# Altium PCB VapeixShield.PcbDoc
Units mm, origin at the board's own origin, x right, y up, seen from the top; angles counter-clockwise.
Board outline 70.15 x 53.67 mm, 4 copper layers (Top Layer, Mid-layer1, Mid-Layer2, Bottom Layer), stack 0.778 mm thick; 84 components, 77 nets, 268 pads, 86 vias.
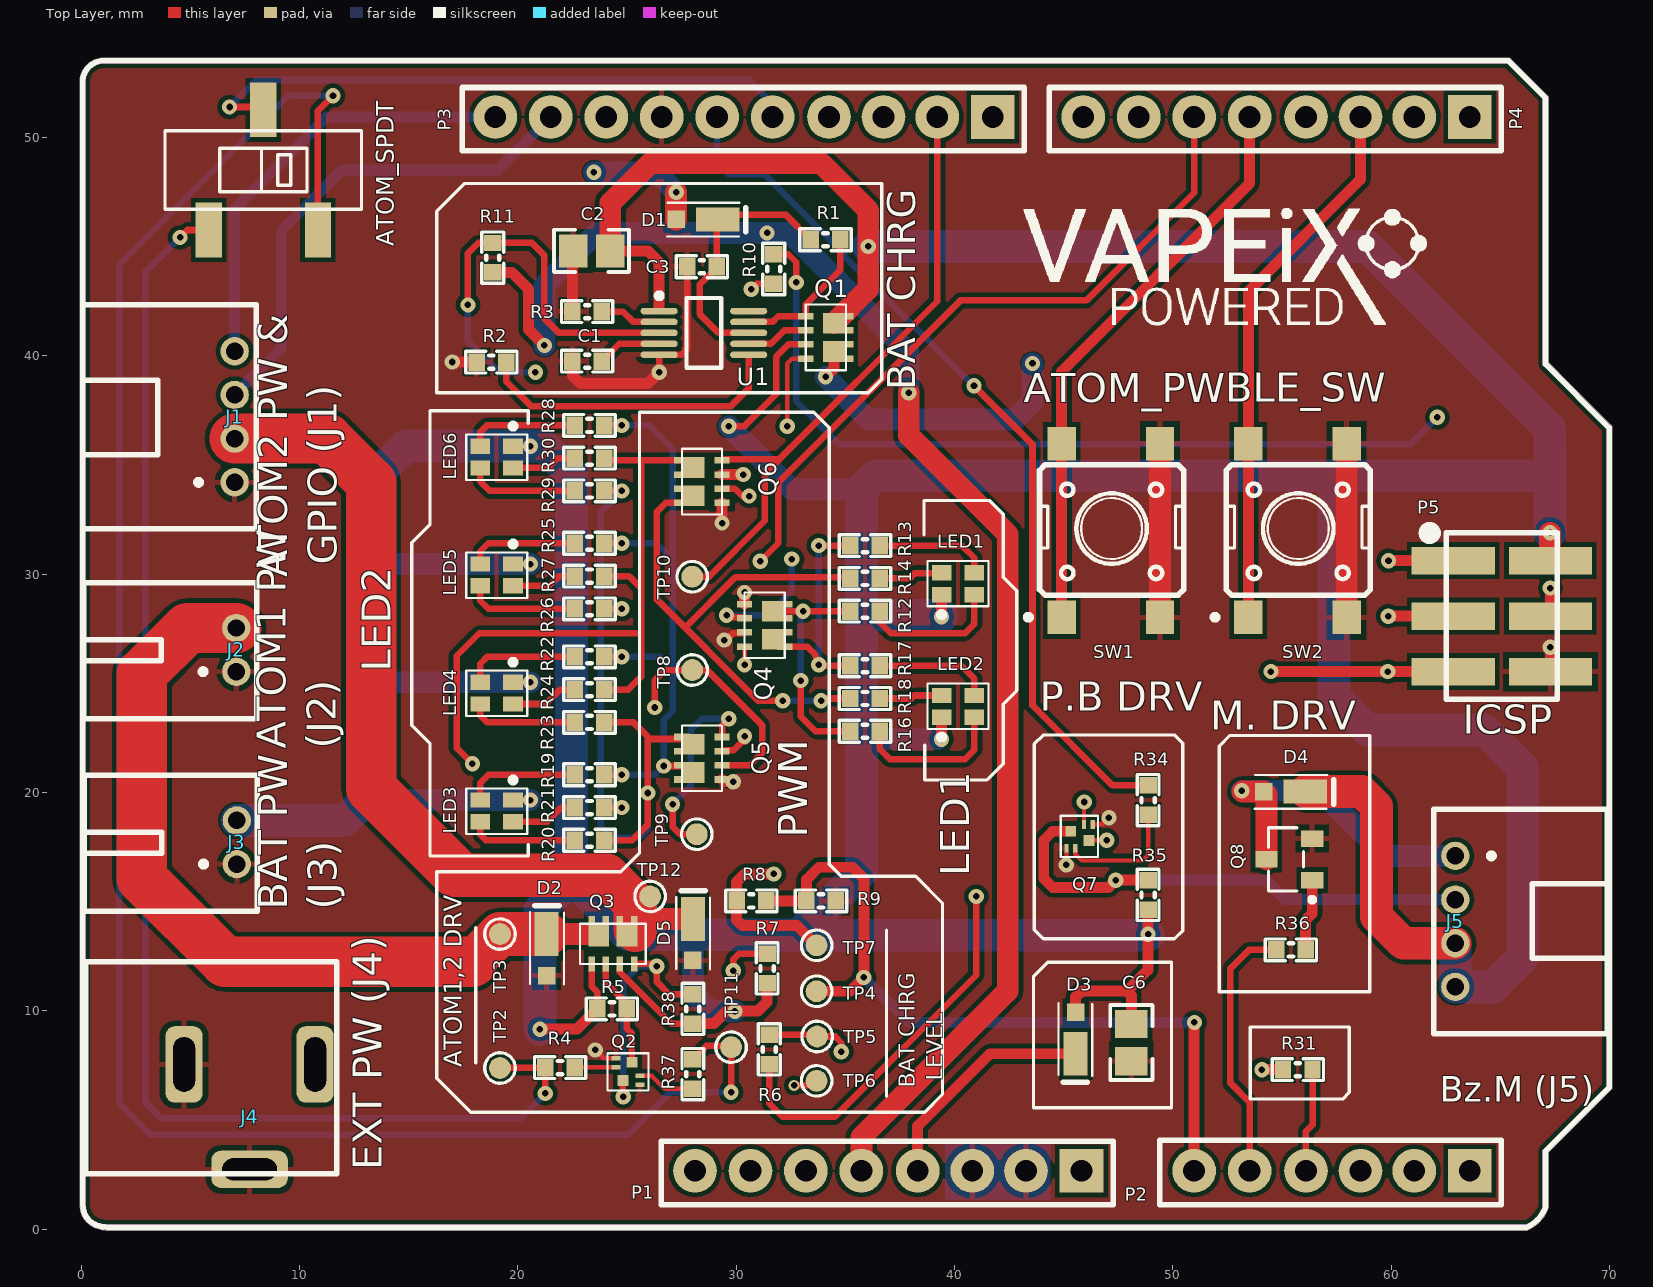
[diagram p0: Top Layer view]
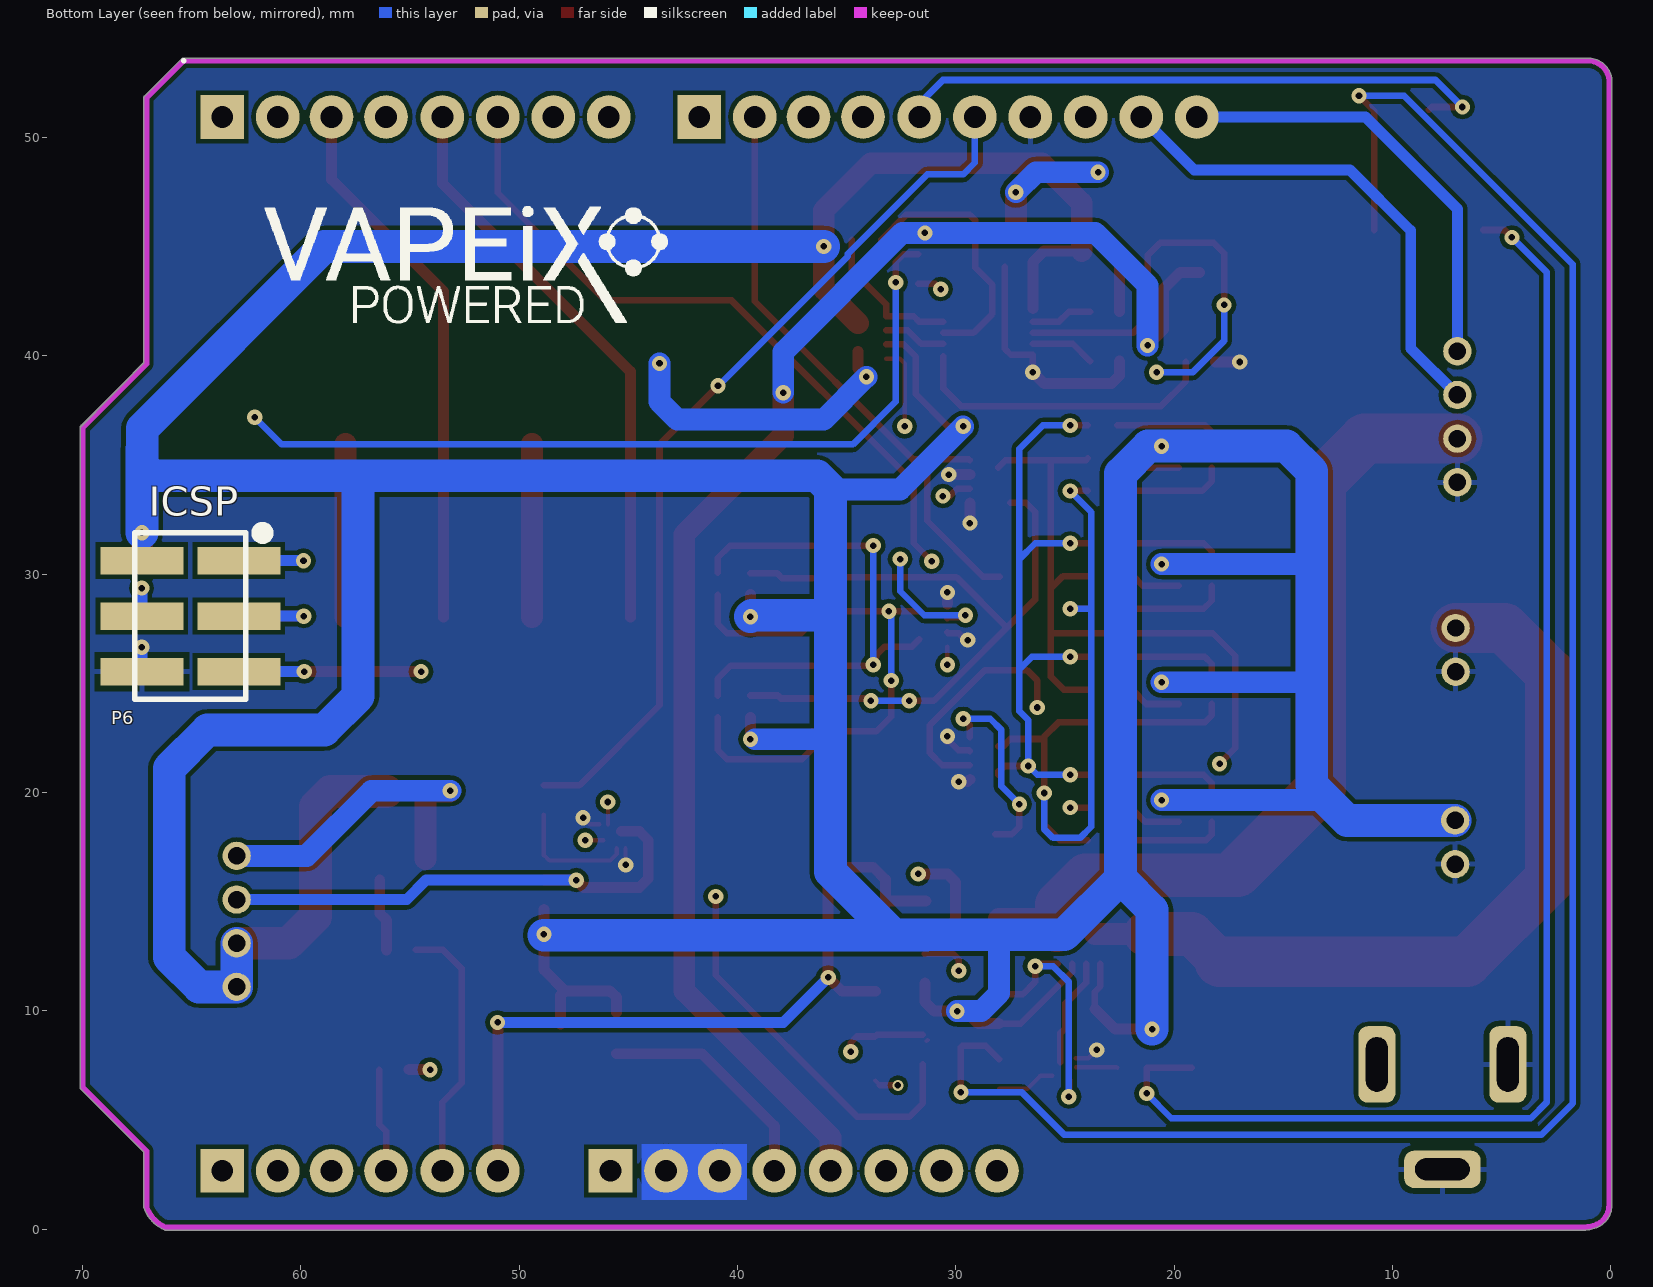
[diagram p1: Bottom Layer view, seen from below]
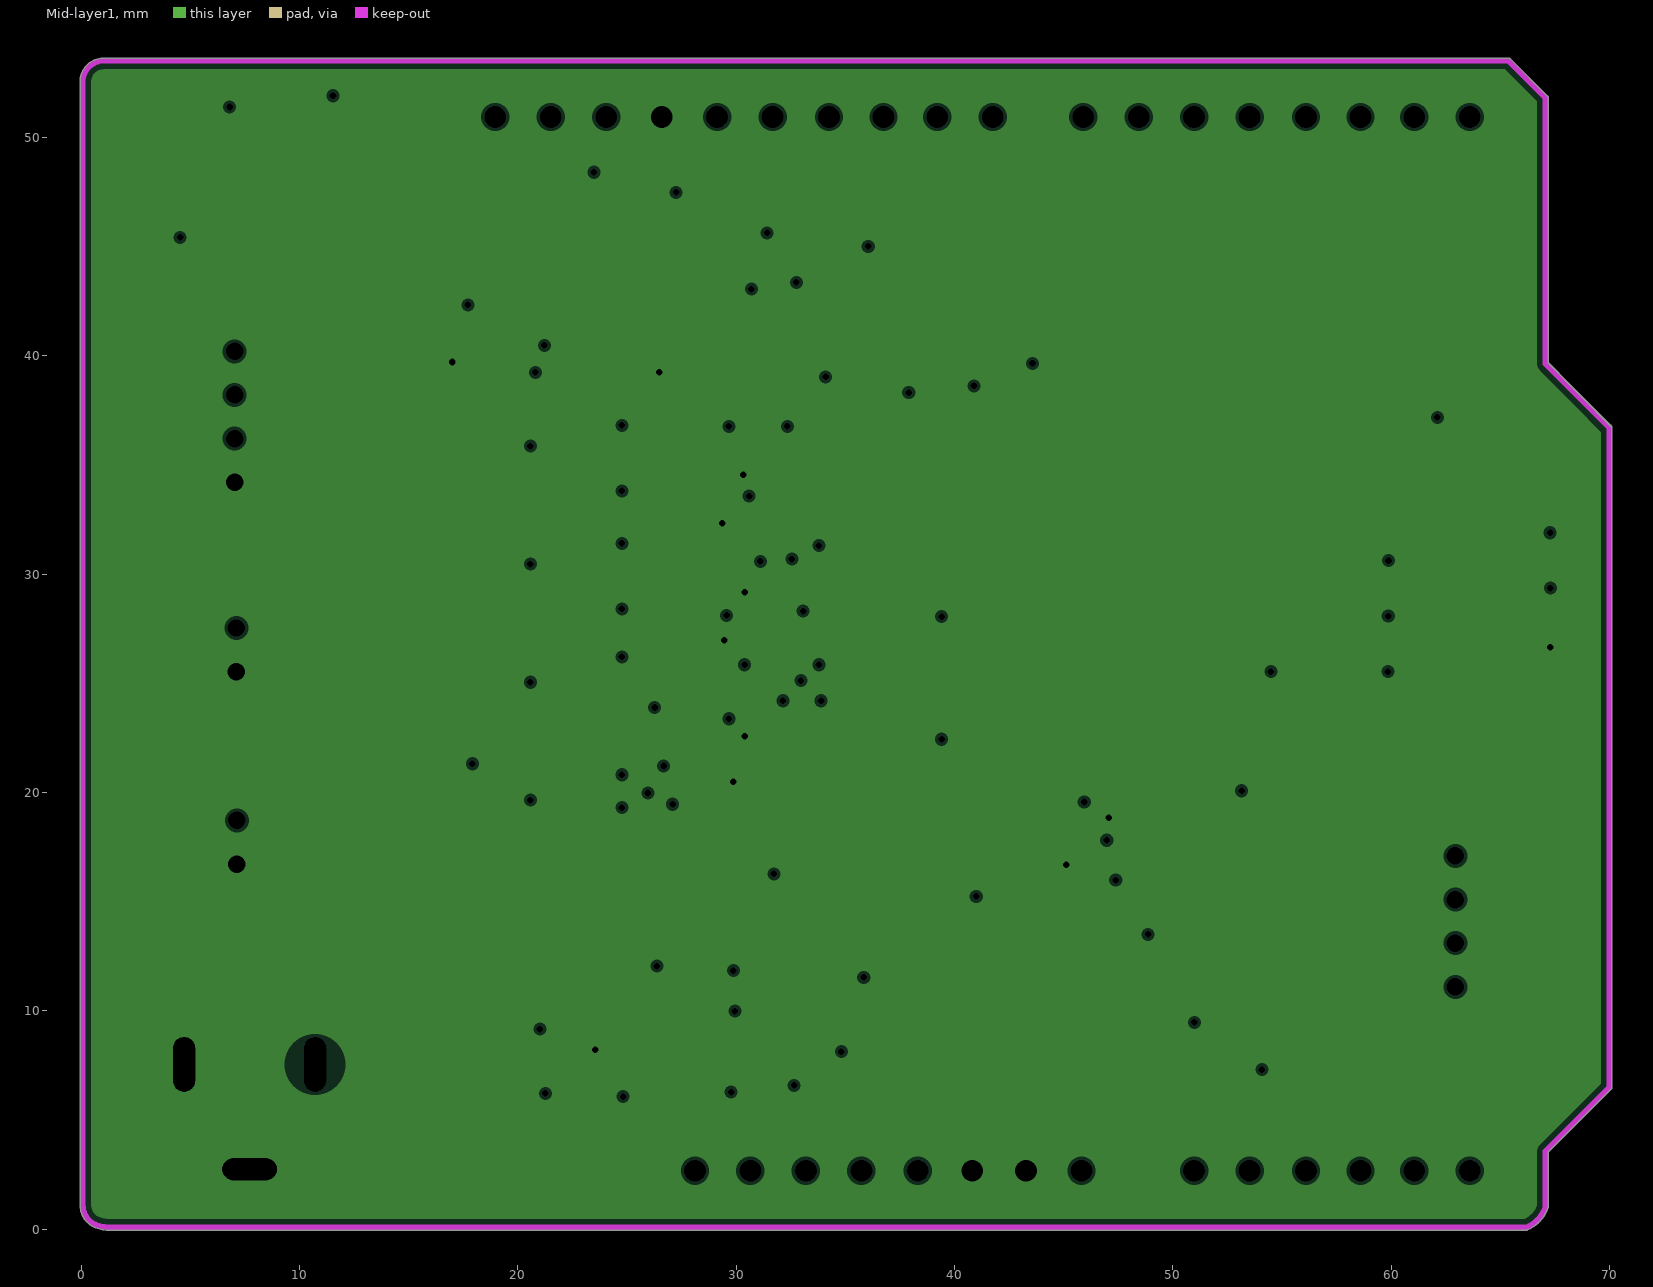
[diagram p2: Mid-layer1, clearances drawn from the general rule]
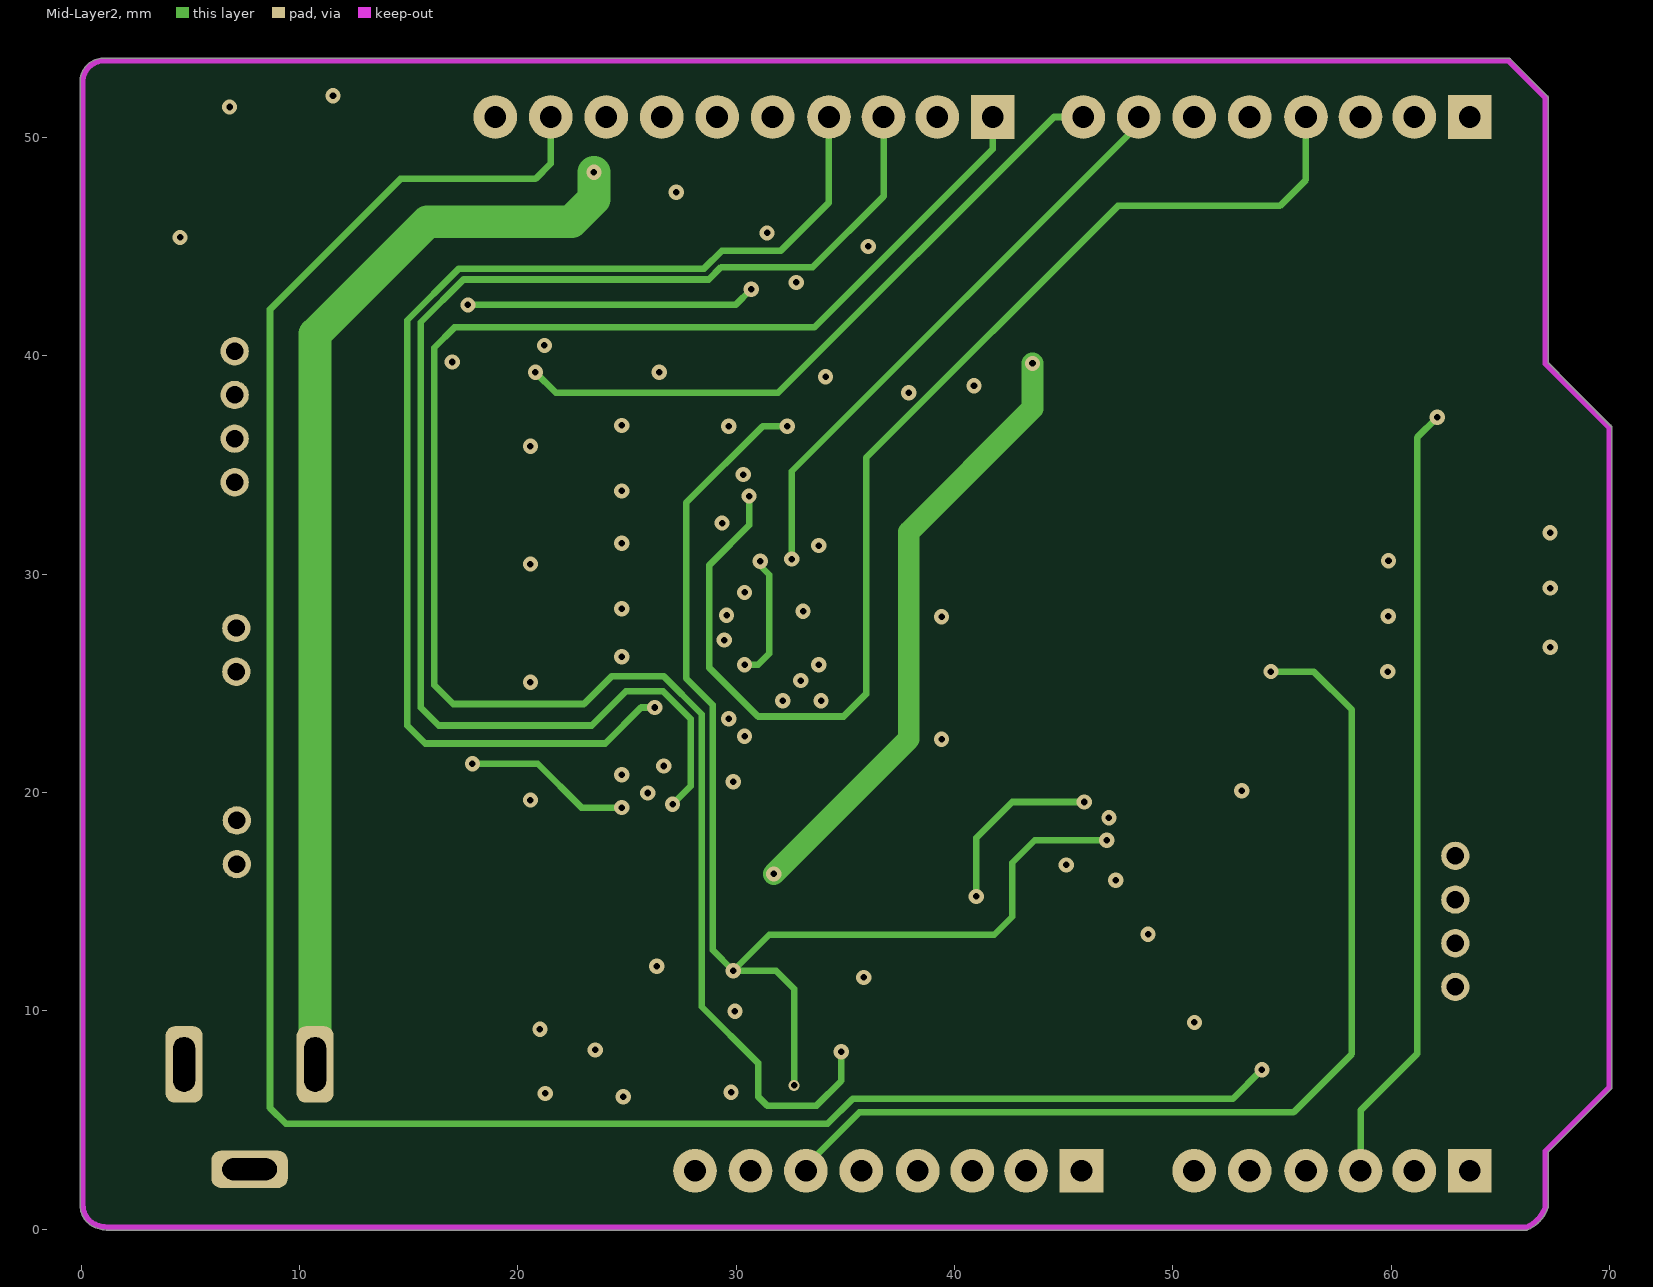
[diagram p3: Mid-Layer2]
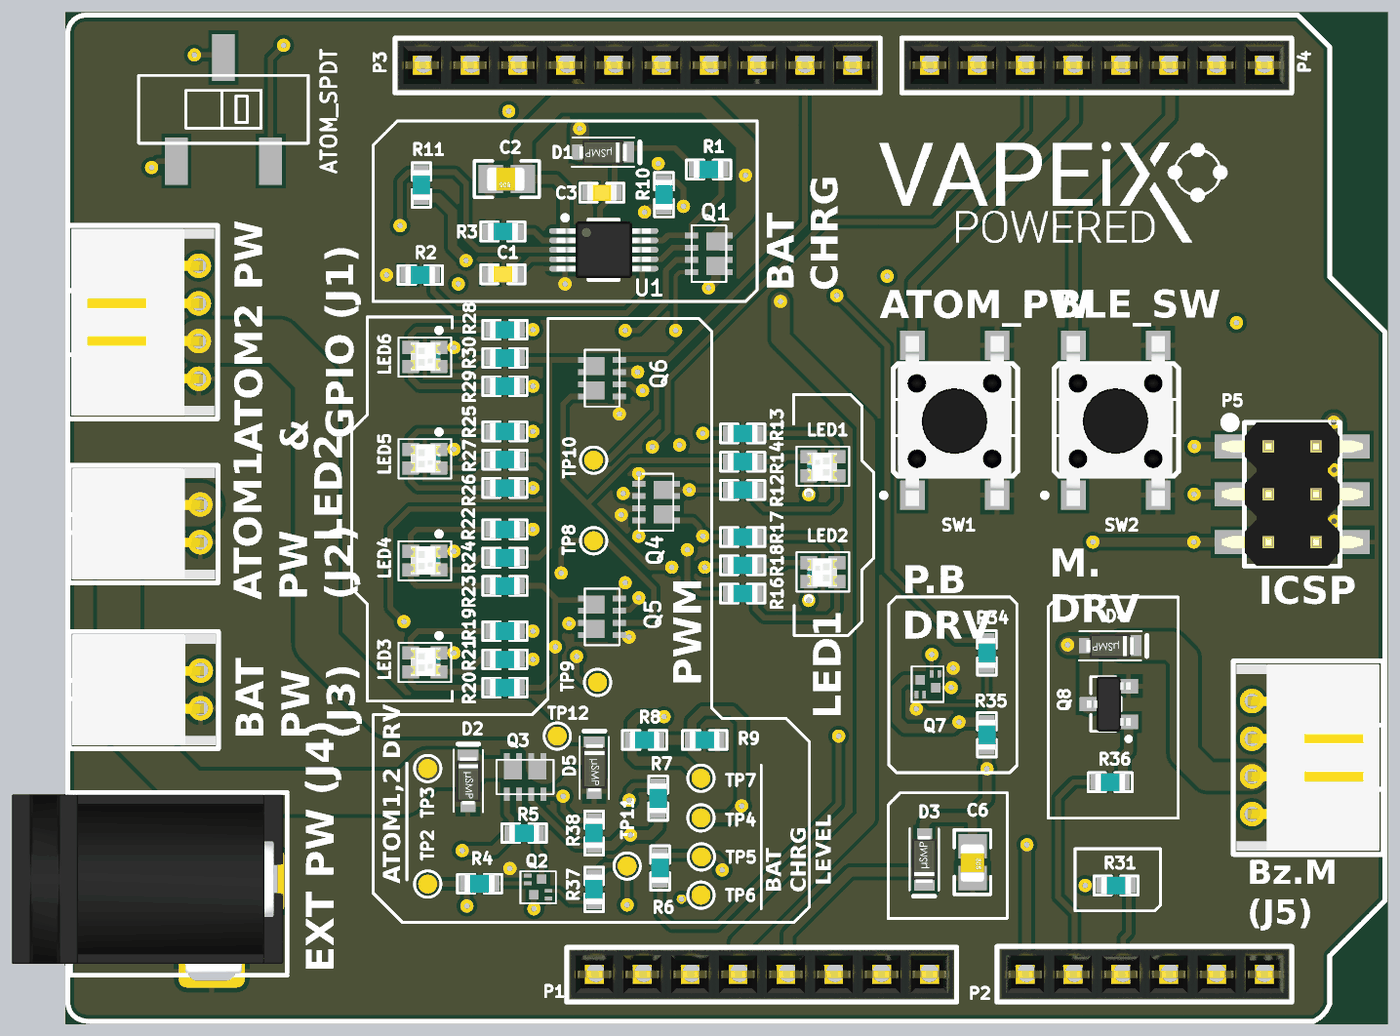
[diagram p4: 3D render of the assembled board from above, using the file's embedded part models]

## Layer stack, top to bottom
Top Solder: solder mask 0.0102, Solder Resist, Dk 3.5
Top Layer: signal copper 0.0356
Dielectric 1: core 0.254, FR-4, Dk 4.2
Mid-layer1: plane copper 0.036, net GND
Dielectric 4: prepreg 0.127, Dk 4.2
Mid-Layer2: signal copper 0.0356
Dielectric 3: core 0.254, FR-4, Dk 4.2
Bottom Layer: signal copper 0.0356
Bottom Solder: solder mask 0.0102, Solder Resist, Dk 3.5

## Board outline
0.145,0.484 cw(c1.045,1.096) -0.044,1.082 cw(c0.081,1.108) -0.045,1.093 cw(c0.081,1.108) -0.046,1.108 -0.046,52.626 cw(c0.081,52.626) -0.046,52.636 cw(c1.039,52.55) 1.092,53.637 65.362,53.637 cw(c65.362,53.51) 65.452,53.6 cw(c65.362,53.51) 65.453,53.599 cw(c65.364,53.508) 65.454,53.598 cw(c65.364,53.508) 65.455,53.598 67.146,51.906 67.146,51.907 cw(c67.056,51.816) 67.183,51.816 67.183,39.677 70.067,36.793 70.067,36.794 cw(c69.977,36.703) 70.104,36.707 ccw(c69.977,36.712) 70.104,36.712 ccw(c69.977,36.712) 70.067,36.802 ccw(c69.977,36.712) 70.034,36.826 70.067,36.802 67.183,39.686 70.104,36.712 70.104,6.504 cw(c69.977,6.504) 70.067,6.414 67.181,3.528 67.181,1.011 cw(c67.054,1.011) 67.174,0.968 cw(c65.569,1.543) 66.242,-0.023 cw(c66.192,0.094) 66.192,-0.033 1.371,-0.033 cw(c1.346,0.091) 1.355,-0.036 cw(c1.273,1.144) 1.05,-0.017 cw(c1.078,0.843) 0.762,0.042 cw(c0.809,0.161) 0.748,0.049 cw(c1.045,1.096)

## Design rules (kind name [scope] priority, off if disabled: settings)
Clearance Clearance_1 [inpoly] p1: gap=0.2
Clearance [All] p2: gap=0.2
ComponentClearance ComponentClearance_1 [InComponent('JP1')] p1: gap=0 collisioncheckmode=3 verticalgap=0 showdistances=FALSE
ComponentClearance [All] p2: gap=0.254 collisioncheckmode=3 verticalgap=0.254 showdistances=FALSE
HoleSize [All] p1: absolutevalues=TRUE maxlimit=8 minlimit=0.2 maxpercent=80.000 minpercent=20.000
HoleToHoleClearance [All] p1: gap=0.1 allowstackedmicrovias=TRUE
MinimumSolderMaskSliver [All] p1: minsoldermaskwidth=0.01
PasteMaskExpansion [All] p1: expansion=0.001
PlaneClearance [All] p1: clearance=0.15
PlaneConnect [All] p1: planeconnectstyle=Direct reliefexpansion=0.254 reliefentries=4 reliefconductorwidth=0.254 reliefairgap=0.254
PolygonConnect PolygonConnect_1 [IsVia] p1: connectstyle=Direct reliefconductorwidth=0.254 reliefentries=4 polygonreliefangle="90 Angle" airgapwidth=0.254
PolygonConnect [All] p2: connectstyle=Relief reliefconductorwidth=0.254 reliefentries=4 polygonreliefangle="90 Angle" airgapwidth=0.254
RoutingVias [All] p1: holewidth=0.3 width=0.5 viastyle="Through Hole" minholewidth=0.3 minwidth=0.5 maxholewidth=0.711 maxwidth=1.27
ShortCircuit [All] p1: allowed=TRUE
SilkToSilkClearance [All] p1: silktosilkclearance=0.01
SilkToSolderMaskClearance [IsPad] p1: minsilkscreentomaskgap=0 clearancetoexposedcopper=TRUE
SolderMaskExpansion SolderMaskExpansion_2 [IsVia] p1: expansion=0 soldermaskfromhole=TRUE
SolderMaskExpansion [All] p2: expansion=0.001
Width [All] p1: maxlimit=3 minlimit=0.2 preferedwidth=0.203
20 further rules are at their usual default settings.

## Components (designator, comment, footprint, x,y, rotation, side; value= is the part's Value field where it differs from the comment)
ATOM_SPDT "SPDT" SPDT 8.343,48.513 r0 top locked
C1 "" CAPC1608X06L 23.175,39.758 r180 top
C2 "Cap Pol3" C0805 23.381,44.805 r180 top
C3 "" CAPC1608X06L 28.428,44.084 r180 top
C6 "Cap Pol3" C0805 48.097,8.555 r270 top
D1 "MSS2P2-M3" MSS2P2-M3 29.149,46.247 r180 top
D2 "MSS2P2-M3" MSS2P2-M3 21.321,13.521 r270 top
D3 "MSS2P2-M3" MSS2P2-M3 45.547,8.04 r90 top
D4 "MSS2P2-M3" MSS2P2-M3 56.06,20.045 r180 top
D5 "MSS2P2-M3" MSS2P2-M3 28.016,14.214 r270 top
J1 "Atom1 (4)" S4B-PH-K-S 7.031,34.21 r90 top locked
J2 "Atom2 (2)" S2B-PH-K-S 7.111,25.537 r90 top locked
J3 "BAT_PW" S2B-PH-K-S 7.134,16.725 r90 top locked
J4 "DC JACK" "DC POWER JACK" 10.717,7.55 r0 top locked
J5 "Driver CON" S4B-PH-K-S 62.934,17.102 r270 top locked
LED1 "HSMF-C114" HSMF-C114 39.406,29.012 r0 top
LED2 "HSMF-C114" HSMF-C114 39.406,23.397 r0 top
LED3 "HSMF-C114" HSMF-C114 19.782,19.709 r180 top
LED4 "HSMF-C114" HSMF-C114 19.782,25.106 r180 top
LED5 "HSMF-C114" HSMF-C114 19.782,30.518 r180 top
LED6 "HSMF-C114" HSMF-C114 19.782,35.918 r180 top
P1 "Header 8" LS-00008 45.812,2.68 r180 top locked
P2 "Header 6H" LS-00007 63.592,2.68 r180 top locked
P3 "Header 10" LS-00009 41.748,50.94 r180 top locked
P4 "Header 8" LS-00008 63.592,50.94 r180 top locked
P5 "TOP" "Molex 15-91-2060" 65.063,28.08 r270 top locked
P6 "BOTTOM" CLH-103-F-D-BE-K-TR 65.063,28.08 r270 bottom locked
Q1 "SI5999EDU" SI5999EDU 33.185,41.818 r270 top
Q2 "BC847CDLP-7" BC847CDLP-7 25.019,7.223 r270 top
Q3 "SI5999EDU" SI5999EDU 23.381,12.154 r0 top
Q4 "SI5936DU" SI5936DU 30.385,28.634 r270 top
Q5 "SI5936DU" SI5936DU 29.355,20.6 r90 top
Q6 "SI5936DU" SI5936DU 29.355,33.269 r90 top
Q7 "BC847CDLP-7" BC847CDLP-7 45.726,18.021 r180 top
Q8 "MMBT2222ALT1G" MMBT2222ALT1G 55.404,16.964 r0 top
R1 "" INDC1608X06L 34.093,45.32 r0 top
R2 "" INDC1608X06L 18.788,39.718 r180 top
R3 "" INDC1608X06L 23.175,42.024 r180 top
R4 "" INDC1608X06L 21.936,7.407 r0 top
R5 "" INDC1608X06L 24.308,10.094 r0 top
R6 "" INDC1608X06L 31.518,8.24 r270 top
R7 "" INDC1608X06L 31.415,11.948 r90 top
R8 "" INDC1608X06L 30.694,15.038 r0 top
R9 "" INDC1608X06L 33.887,15.038 r0 top
R10 "" INDC1608X06L 31.724,43.981 r270 top
R11 "" INDC1608X06L 18.849,44.496 r90 top
R12 "" INDC1608X06L 35.9,28.309 r180 top
R13 "" INDC1608X06L 35.9,31.309 r180 top
R14 "" INDC1608X06L 35.9,29.809 r180 top
R16 "" INDC1608X06L 35.9,22.809 r180 top
R17 "" INDC1608X06L 35.9,25.809 r180 top
R18 "" INDC1608X06L 35.9,24.309 r180 top
R19 "" INDC1608X06L 23.282,20.815 r0 top
R20 "" INDC1608X06L 23.282,17.815 r0 top
R21 "" INDC1608X06L 23.282,19.315 r0 top
R22 "" INDC1608X06L 23.282,26.215 r0 top
R23 "" INDC1608X06L 23.282,23.215 r0 top
R24 "" INDC1608X06L 23.282,24.715 r0 top
R25 "" INDC1608X06L 23.282,31.415 r0 top
R26 "" INDC1608X06L 23.282,28.415 r0 top
R27 "" INDC1608X06L 23.282,29.915 r0 top
R28 "" INDC1608X06L 23.282,36.815 r0 top
R29 "" INDC1608X06L 23.282,33.815 r0 top
R30 "" INDC1608X06L 23.282,35.315 r0 top
R31 "" INDC1608X06L 55.719,7.313 r180 top
R34 "" INDC1608X06L 48.862,19.654 r90 top
R35 "" INDC1608X06L 48.862,15.314 r270 top
R36 "" INDC1608X06L 55.404,12.796 r180 top
R37 "" INDC1608X06L 28.016,7.107 r270 top
R38 "" INDC1608X06L 28.016,10.094 r90 top
SW1 "Atomizer_Power_Button" PTS645SH50SMTR92 44.907,28.028 r90 top
SW2 "Bluetooth Button" PTS645SH50SMTR92 53.453,28.028 r90 top
TP2 "TP" TP 19.182,7.388 r90 top
TP3 "TP" TP 19.182,13.521 r90 top
TP4 "TP" TP 33.684,10.903 r90 top
TP5 "TP" TP 33.707,8.831 r90 top
TP6 "TP" TP 33.684,6.8 r90 top
TP7 "TP" TP 33.684,13.006 r90 top
TP8 "TP" TP 27.988,25.612 r180 top
TP9 "TP" TP 28.197,18.094 r180 top
TP10 "TP" TP 27.988,29.888 r180 top
TP11 "TP" TP 29.767,8.343 r180 top
TP12 "TP" TP 26.059,15.244 r90 top
U1 "LTC4050EMS" LTC4050EMS 26.491,42.068 r270 top locked

## Footprints (in the part's own frame and the unit in brackets; to place one, negate y for a bottom-side part, rotate by r counter-clockwise, add the part's x,y. Pads: shape width x height; smd on the part's side, far side on the other; paste and mask are expansions set on the pad)
BC847CDLP-7 [mm] "TRANS 2NPN 45V 0.1A 6DFN"
  rect 0.2x0.4 smd: 1(-0.609,-0.521) 2(-0.203,-0.521) 4(0.6,0.572) 5(0.196,0.572)
  rect 0.5x0.5 smd: 3(-0.426,0.208) 6(0.404,-0.208)
  silkscreen extent -0.84,-0.91 0.86,0.97, body extent -0.79,-0.67 0.81,0.69, height 0.4
C0805 [mm]
  rect 1.3x1.5 smd: 1(-0.85,0) 2(0.85,0)
  silkscreen extent -1.72,-0.97 1.72,0.97, body extent -0.95,-0.62 1.05,0.63, height 0.78
CAPC1608X06L [mm]
  rect 0.75x0.8 smd: 1(-0.675,0) 2(0.675,0)
  silkscreen extent -1.17,-0.5 1.18,0.5, body extent -0.8,-0.43 0.8,0.43, height 0.8
CLH-103-F-D-BE-K-TR [mm] "SAMTEC - CLH-103-F-D-BE-K-TR - SOCKET, 2.54MM, SMT, 6WAY"
  rect 1.27x3.81 smd: 1(-2.54,2.234) 2(-2.54,-2.211) 3(0,2.234) 4(0,-2.211) 5(2.54,2.234) 6(2.54,-2.211)
  silkscreen extent -4.06,-2.53 3.81,3.57, body extent -3.81,-3.54 3.81,3.57, height 3.56
"DC POWER JACK" [mm] "Adafruit Accessories 2.1mm DC Barrel Jack Breadboard Friendly"
  rrect50% 1.7x3.5 hole 1 slot 2.5 at 90 deg: 1(0,0) 2(-6,0)
  rrect50% 3.5x1.7 hole 1 slot 2.5 at 0 deg: 3(-3,-4.8)
  silkscreen extent -10.5,-5 1,4.7, body extent -13.6,-4.9 0.8,4.6, height 11
HSMF-C114 [mm] "LED RGB DIFFUSED 0606 SMD"
  rect 0.9x0.7 smd: 1(0,0.051) 2(0,1.049) 3(1.5,1.049) 4(1.5,0.051)
  silkscreen extent -0.65,-0.96 2.15,1.6, body extent -0.09,-0.22 1.51,1.28, height 0.34
INDC1608X06L [mm] "PSON, 6-Leads, Body 3x4 mm, Pitch 0.8mm, NSC Recommended"
  rect 0.75x0.8 smd: 1(-0.675,0) 2(0.675,0)
  silkscreen extent -1.18,-0.5 1.17,0.5, body extent -0.8,-0.48 0.8,0.48, height 0.8
LS-00007 [mm] "Arduino Female Stackable Header - 6 pin(4 pack)"
  rect 2x2 hole 1: 1(0,0)
  round 2 hole 1: 2(2.54,0) 3(5,0) 4(7.5,0) 5(10.08,0) 6(12.62,0)
  silkscreen extent -1.45,-1.4 14.2,1.55, body extent -1.27,-1.19 13.97,1.35, height 8.5
LS-00008 [mm] "Arduino Femal e Stackable Headers - 8 pin (4 pack)"
  rect 2x2 hole 1: 1(0,0)
  round 2 hole 1: 2(2.54,0) 3(5,0) 4(7.5,0) 5(10.08,0) 6(12.62,0) 7(15.16,0) 8(17.7,0)
  silkscreen extent -1.45,-1.35 19.25,1.55, body extent -1.27,-1.19 19.05,1.35, height 8.5
LS-00009 [mm] "Arduino Female Stackable Header - 10 pin (4 pack)"
  rect 2x2 hole 1: 1(0,0)
  round 2 hole 1: 2(2.54,0) 3(5,0) 4(7.5,0) 5(10.08,0) 6(12.62,0) 7(15.16,0) 8(17.7,0) 9(20.24,0) 10(22.78,0)
  silkscreen extent -1.45,-1.35 24.3,1.55, body extent -1.27,-1.19 24.13,1.35, height 8.5
LTC4050EMS [mm] "IC BATT CHRG CNTRL LI-ION 10MSOP"
  oval 0.3x1.7 smd: 1(0.016,-0.018) 2(0.516,-0.018) 3(1.016,-0.018) 4(1.516,-0.018) 5(2.016,-0.018) 6(2.016,4.082) 7(1.516,4.082) 8(1.016,4.082) 9(0.516,4.082) 10(0.016,4.082)
  silkscreen extent -0.81,-0.14 2.62,2.83, body extent -0.48,-0.48 2.52,4.55, height 1.05
MMBT2222ALT1G [mil] "TRANS NPN 40V 0.6A SOT23"
  rect 40x30 smd: 1(38.4,-38.18) 2(38.4,36.63) 3(-44.27,-0.78)
  silkscreen extent -40,-78 42,56, body extent -49,-58 43,57, height 39
"Molex 15-91-2060" [mil] "CONN HEADER 6POS .100\" VERT TIN"
  rect 50x150 smd: 1(-100,-87.5) 2(-100,87.5) 3(0,-87.5) 4(0,87.5) 5(100,-87.5) 6(100,87.5)
  silkscreen extent -160,-140 150,100, body extent -150,-148 150,148, height 382
MSS2P2-M3 [mm] "DIODE SCHOTTKY 20V 2A MICROSMP"
  rect 0.8x0.8 smd: 1(1.9,0)
  rect 2x1.1 smd: 2(0,0)
  silkscreen extent -1.3,-0.76 2.31,0.79, body extent -0.59,-0.64 1.91,0.66, height 0.66
PTS645SH50SMTR92 [mm] "SWITCH TACTILE SPST-NO 0.05A 12V"
  rect 1.55x1.3 smd: 1(0,0) 1(7.95,0) 2(0,-4.5) 2(7.95,-4.5)
  silkscreen extent -0.12,-5.59 6.99,1.65, body extent -0.56,-5.24 8.44,0.76, height 4.3
S2B-PH-K-S [mm] "CONN HEADER PH SIDE 2POS 2MM"
  round 1.3 hole 0.8: 1(0,0) 2(2,0)
  silkscreen extent -2.16,-0.94 4.07,6.98, body extent -1.98,-0.78 3.92,6.82, height 4.8
S4B-PH-K-S [mm] "CONN HEADER PH SIDE 4POS 2MM"
  round 1.3 hole 0.8: 1(0,0) 2(2,0) 3(4,0) 4(6,0)
  silkscreen extent -2.13,-1 8.14,6.96, body extent -1.95,-0.83 7.95,6.77, height 4.8
SI5936DU [mm] "MOSFET 2N-CH 30V 6A POWERPAK"
  rect 0.3x0.7 smd: 1(0,0) 2(0.648,0) 3(1.295,0) 4(1.945,0) 5(1.295,1.842) 5(1.945,1.842) 7(0,1.841) 7(0.648,1.841)
  rect 0.945x1 smd: 5(1.619,1.296)
  rect 0.947x1 smd: 7(0.323,1.296)
  silkscreen extent -0.53,0 2.48,1.84, body extent -0.43,0.07 2.35,1.77, height 0.85
SI5999EDU [mm] "MOSFET 2P-CH 20V 6A POWERPAK"
  rect 0.3x0.7 smd: 1(0,0) 2(0.648,0) 3(1.295,0) 4(1.945,0) 5(1.295,1.842) 5(1.945,1.842) 7(0,1.841) 7(0.648,1.841)
  rect 0.945x1 smd: 5(1.619,1.296)
  rect 0.947x1 smd: 7(0.323,1.296)
  silkscreen extent -0.53,0 2.48,1.84, body extent -0.43,0.07 2.35,1.77, height 0.85
SPDT [mm] "JS102011SCQN, Contact rating : 6VDC @ 0.3A"
  rect 1.2x2.5 smd: 1(-2.5,-2.75) 2(0,2.75) 3(2.5,-2.75)
  silkscreen extent -4.5,-1.8 4.5,1.8, body extent -4.52,-3.75 4.52,3.75, height 5.5
TP [mm] "Test Point"
  round 1 smd paste-5: 1(0,0)
  silkscreen extent -0.7,-0.7 0.7,0.7

## Part data
ATOM_SPDT: "SWITCH SLIDE SPDT 300MA 6V"
C1 C3: library part GRM219R61A106KE44D, "CAP, CERM, 10 µF, 10 V, +/- 10%, X5R, 0805"
C2 C6: "Polarized Capacitor (Surface Mount)"
D1 D2 D3 D4 D5: library part MSS2P2-M3/89A, "DIODE SCHOTTKY 20V 2A MICROSMP"
J1 J5: library part S4B-PH-K-S(LF)(SN), "CONN HEADER PH SIDE 4POS 2MM"
J2 J3: library part S2B-PH-K-S(LF)(SN), "CONN HEADER PH SIDE 2POS 2MM"
J4: library part "DC POWER JACK", "Adafruit Accessories 2.1mm DC Barrel Jack Breadboard Friendly"
LED1 LED2 LED3 LED4 LED5 LED6: "LED RGB DIFFUSED 0606 SMD"
P1 P4: library part LS-00008, "Arduino Femal e Stackable Headers - 8 pin (4 pack)"
P2: "Header, 6-Pin, Right Angle"
P3: library part LS-00009, "Arduino Female Stackable Header - 10 pin (4 pack)"
P5: library part 0015912060, "CONN HEADER 6POS .100\" VERT TIN"
P6: library part M20-7870346, "Headers & Wire Housings 03+03 DIL SMT SKT BOTTOM ENTRY TIN"
Q1 Q3: library part SI5999EDU-T1-GE3, "MOSFET 2P-CH 20V 6A POWERPAK"
Q2 Q7: "TRANS 2NPN 45V 0.1A 6DFN"
Q4 Q5 Q6: library part SI5936DU-T1-GE3, "MOSFET 2N-CH 30V 6A PWRPK CHPFET"
Q8: "TRANS NPN 40V 0.6A SOT23"
R1 R2 R3 R4 R5 R6 R7 R8 R9 R10 R11 R12 R13 R14 R16 R17 R18 R19 R20 R21 R22 R23 R24 R25 R26 R27 R28 R29 R30 R31 R34 R35 R36 R37 R38: library part Res2, "Resistor"
SW1 SW2: library part "PTS645SH50SMTR92 LFS", "SWITCH TACTILE SPST-NO 0.05A 12V"
TP2 TP3 TP4 TP5 TP6 TP7 TP8 TP9 TP10 TP11 TP12: "TEST POINT"
U1: library part LTC4050EMS-4.1#PBF, "IC BATT CHRG CNTRL LI-ION 10MSOP"

## Via types
v1: diameter 0.7, hole 0.3, Top Layer to Bottom Layer, 85 vias
v2: diameter 0.5, hole 0.3, Top Layer to Bottom Layer, 1 vias

## Nets (pads, with @x,y where several pads share a name; then routed paths per layer and width w, separated by ;. In a path a pad name is that pad's centre, name@x,y a point inside that pad or via, vN(x,y) a via of type N, cw(c..) or ccw(c..) an arc to the next point about the centre after c; other vN are vias at no path point)
3V3: P1.5 R11.1 | length 69.7
  Top Layer w0.5: R11.1 19.73,43.821 20.497,43.054 20.497,41.2 v1(21.218,40.479)
  Top Layer w1: P1.5 35.732,4.214 42.436,10.918 42.436,31.827 37.904,36.359 v1(37.904,38.316)
  Bottom Layer w1: v1(21.218,40.479) 21.218,43.227 23.62,45.629 v1(31.415,45.629) 32.445,45.629 37.904,40.17 v1(37.904,38.316)
AREF: P3.8
ATM1: D2.2 J2.2 Q3.7 TP3.1 | length 37.6
  Top Layer w0.5: Q3.7@23.633,13.521 Q3.7@23.704,13.45
  Top Layer w1: D2.2 Q3.7@23.633,13.521
  Top Layer w2: 17.911,12.25 TP3.1 D2.2
  Top Layer w2.3: J2.2 4.877,27.537 2.781,25.441 2.781,16.068 6.599,12.25 17.911,12.25
ATM1_SG: ATOM_SPDT.1 R4.1 TP2.1 | length 64.1
  Top Layer w0.3: v1(4.532,45.423) 4.872,45.763 ATOM_SPDT.1 ; TP2.1@19.201,7.407 R4.1 v1(21.261,6.223)
  Bottom Layer w0.3: v1(4.532,45.423) 2.929,43.82 2.929,5.826 3.663,5.092 20.13,5.092 v1(21.261,6.223)
ATM2: D5.2 J1.2 Q3.5 TP12.1 | length 39.9
  Top Layer w0.5: Q3.5@25,13.45 25.707,13.45 26.471,14.214
  Top Layer w1: 26.471,14.214 D5.2
  Top Layer w2: 17.098,16.377 17.26,16.215 24.058,16.215 25.379,14.894 Q3.5@25.379,13.704
  Top Layer w2.3: J1.2 11.273,36.21 13.287,34.196 13.287,20.188 17.098,16.377
ATM2_SG: ATOM_SPDT.3 R37.1 TP11.1 | length 91.4
  Top Layer w0.3: ATOM_SPDT.3 10.843,51.219 v1(11.536,51.912) ; R37.1 28.634,8.4 29.71,8.4 TP11.1 v1(29.767,6.283)
  Bottom Layer w0.3: v1(11.536,51.912) 9.476,51.912 1.751,44.187 1.751,5.768 3.193,4.326 25.029,4.326 26.986,6.283 v1(29.767,6.283)
ATOM_PW: P4.5 SW1.1 | length 26.5
  Top Layer w0.5: SW1.1@44.907,28.028 44.907,35.978 44.907,39.29 53.512,47.895 P4.5
ATOMIZER: ATOM_SPDT.2 P3.5 | length 28
  Top Layer w0.3: v1(6.798,51.397) 8.209,51.397 ATOM_SPDT.2
  Bottom Layer w0.3: v1(6.798,51.397) 8.034,52.633 30.591,52.633 31.668,51.556 P3.5
B_CH1: P4.7 Q4.2 | length 32.6
  Top Layer w0.3: v1(29.561,28.119) 29.646,28.034 30.337,28.034 Q4.2
  Mid-Layer2 w0.3: v1(32.548,30.694) 32.548,34.711 48.432,50.595 P4.7
  Bottom Layer w0.3: v1(29.561,28.119) 31.446,28.119 32.548,29.221 v1(32.548,30.694)
B_CH2/MOSI: P3.4 Q5.2 TP8.1 | length 67.1
  Top Layer w0.3: v1(26.265,23.896) 26.265,25.132 26.745,25.612 TP8.1 28.669,25.612 31.188,23.093 31.188,21.815 30.621,21.248 Q5.2
  Mid-Layer2 w0.3: v1(26.265,23.896) 25.647,23.896 23.999,22.248 15.759,22.248 14.935,23.072 14.935,41.626 17.305,43.996 28.532,43.996 29.341,44.805 32.033,44.805 34.248,47.02 P3.4
BAT+: C2.1 C6.1 D3.1 D4.2 J3.2 J5.3 J5.4 LED1.1 LED2.1 LED3.1 LED4.1 LED5.1 LED6.1 P5.2 P6.2 Q1.3 Q1.7 Q3.1 Q3.3 R5.1 R7.1 R35.2 R38.1 U1.1 | length 326.6
  Top Layer w0.3: Q3.1 23.381,11.124 23.633,10.872 R5.1 ; Q3.3 24.676,11.776 27.033,9.419 R38.1 ; v1(29.664,36.771) 30.359,36.771 31.827,38.239 31.827,39.964 32.386,40.523 Q1.3
  Top Layer w0.5: v1(21.012,9.167) 22.706,9.167 R5.1 ; C2.1 25.956,44.805 26.46,44.301 U1.1@26.46,42.166 ; R38.1 28.989,9.419 29.561,9.991 v1(29.944,9.991) 31.003,9.991 31.415,10.403 R7.1 ; v1(39.406,22.444) LED2.1 ; v1(39.406,28.059) LED1.1 ; D3.1 45.547,10.63 45.835,10.918 47.895,10.918 ; C6.1 48.097,10.716 47.895,10.918 ; R35.2 v1(48.862,13.507) 48.862,11.885 47.895,10.918
  Top Layer w1: C2.1 24.231,46.994 26.059,48.822 33.887,48.822 36.05,46.659 36.05,43.064 Q1.7@34.481,41.495 ; v1(67.271,31.902) 67.271,30.635 P5.2
  Top Layer w1.5: D4.2 58.647,20.045 59.328,19.364 59.328,14.317 60.543,13.102 J5.3
  Bottom Layer w1: 12.875,19.658 v1(20.577,19.658) ; 13.828,25.055 v1(20.577,25.055) ; 13.884,30.467 v1(20.577,30.467) ; 28.016,13.493 28.016,10.815 28.84,9.991 v1(29.944,9.991) ; v1(29.664,36.771) 32.548,33.887 35.741,33.887 ; 35.806,22.444 v1@39.2,22.444 ; J5.3@62.706,13.102 J5.3 ; 66.435,34.505 67.259,35.329
  Bottom Layer w1.5: J3.2 12.072,18.725 13.699,20.352 13.699,34.711 14.855,35.867 v1(20.577,35.867) 21.195,35.867 22.454,34.608 22.454,16.068 ; v1(21.012,9.167) 21.012,14.626 22.454,16.068 ; 31.362,13.467 v1@48.862,13.467 ; 35.806,22.444 35.741,22.509 ; v1(36.05,45.011) 58.916,45.011 67.259,36.668 67.259,35.329 ; v1@39.14,28.119 36.05,28.119 35.741,27.81 ; v1@39.346,28.119 v1(39.406,28.059) ; J5.3 J5.4 64.662,11.102 66.023,12.463 66.023,21.115 64.272,22.866 58.916,22.866 57.371,24.411 57.371,34.505 ; 66.435,34.505 57.371,34.505 ; v1@67.274,31.902 67.274,35.741 ; 22.454,16.068 25.029,13.493 28.016,13.493 32.857,13.493 35.741,16.377 35.741,22.509 ; 35.741,22.509 35.741,27.81 ; 35.741,27.81 35.741,33.887 36.359,34.505 57.371,34.505
BAT_SENSE: P2.6 R8.2 R9.1 TP4.1 | length 35.8
  Top Layer w0.5: R8.2 R9.1 ; R9.1@33.212,14.889 R9.1 ; TP4.1 35.211,10.903 v1(35.844,11.536) 35.844,16.068 35.329,16.583 33.784,16.583 33.212,16.011 R9.1 ; P2.6 v1@50.972,9.463
  Bottom Layer w0.5: v1(35.844,11.536) 37.904,9.476 v1(50.985,9.476)
BAT_SENSE_EN: P3.1 R6.1 TP5.1 | length 88.4
  Top Layer w0.203: R6.1@31.278,8.669 R6.1@31.322,8.625
  Top Layer w0.3: R6.1 33.623,8.915 TP5.1 34.532,8.831 34.814,8.549 v1(34.814,8.137)
  Mid-Layer2 w0.3: v1(34.814,8.137) 34.814,6.798 33.681,5.665 31.415,5.665 31.003,6.077 31.003,7.622 28.428,10.197 28.428,23.587 26.677,25.338 24.308,25.338 23.027,24.057 17.04,24.057 16.171,24.926 16.171,40.376 17.098,41.303 33.578,41.303 41.748,49.473 P3.1
BLE_RX: P4.1
BLE_SW: P4.3 SW2.1 | length 25
  Top Layer w0.5: SW2.1@53.453,28.028 53.453,35.978 53.453,42.947 58.592,48.086 P4.3
BLE_TX: P4.2
BUZZEREN: P3.6 R34.2 | length 40.7
  Top Layer w0.3: v1(40.891,38.625) 43.569,35.947 43.569,23.999 47.239,20.329 R34.2
  Bottom Layer w0.3: P3.6 29.128,48.843 29.664,48.307 31.312,48.307 34.95,44.669 34.95,44.555 40.88,38.625 v1(40.891,38.625)
BUZZERSIG: J5.2 Q7.6 R35.1 | length 24.2
  Top Layer w0.5: Q7.6 44.494,18.229 44.084,17.819 44.084,16.068 44.496,15.656 47.047,15.656 v1(47.38,15.989) R35.1
  Bottom Layer w0.5: v1(47.38,15.989) 54.257,15.989 55.144,15.102 J5.2
CARTRIDGE_EN: P2.4 R31.1 | length 5.1
  Top Layer w0.3: P2.4 56.092,4.489 56.394,4.791 R31.1
  Mid-Layer2 w0.3: P2.4 P2.4@56.092,3.047
G_CH1: P4.6 Q4.4 | length 38.5
  Top Layer w0.203: v1(30.385,25.853) Q4.4
  Top Layer w0.3: v1(31.106,30.591) 31.93,31.415 31.93,34.196 40.273,42.539 46.041,42.539 50.972,47.47 P4.6
  Mid-Layer2 w0.3: v1(30.385,25.853) 31.003,25.853 31.518,26.368 31.518,29.973 31.106,30.385 v1(31.106,30.591)
G_CH2/SS: P3.3 Q5.4 TP9.1 | length 71.9
  Top Layer w0.3: v1(27.088,19.467) 27.088,18.438 27.432,18.094 TP9.1 ; Q5.4 29.355,23.072 v1(29.664,23.381)
  Mid-Layer2 w0.3: v1(27.088,19.467) 27.913,20.292 27.913,23.381 26.648,24.646 24.955,24.646 23.381,23.072 16.377,23.072 15.553,23.896 15.553,41.537 17.512,43.496 28.739,43.496 29.306,44.063 33.511,44.063 36.748,47.3 P3.3
  Bottom Layer w0.3: v1(27.088,19.467) 27.913,20.292 27.913,22.866 28.428,23.381 v1(29.664,23.381)
GND: C1.2 C2.2 C3.2 C6.2 D2.1 D5.1 J1.1 J2.1 J3.1 J4.2 J4.3 P1.2 P1.3 P3.7 P5.6 P6.6 Q2.1 Q2.4 Q4.1 Q4.3 Q5.1 Q5.3 Q6.1 Q6.3 Q7.1 Q7.4 Q8.2 R2.2 R3.2 R9.2 SW1.2 SW2.2 U1.5 | length 41.2
  Top Layer w0.2: v1@45.126,16.698 Q7.4 ; Q7.1 46.764,18.542 v1(47.071,18.849)
  Top Layer w0.203: v1(23.545,8.217) 23.93,7.832 Q2.1
  Top Layer w0.254: U1.5@26.471,40.05 U1.5
  Top Layer w0.3: v1(26.471,39.243) U1.5@26.471,40.05 ; U1.5@26.472,40.051 27.485,40.051 27.753,40.319 C3.2 ; Q5.3 29.405,21.945 29.891,21.945 v1@30.385,22.439 ; v1(29.458,26.986) 29.546,26.986 29.849,27.289 30.335,27.289 Q4.3
  Top Layer w0.5: v1(16.995,39.718) R2.2 ; C1.2 22.5,39.094 22.866,38.728 25.956,38.728 v1(26.471,39.243) ; R3.2 22.5,44.774 C2.2 ; Q5.1 29.458,20.497 v1(29.87,20.497) ; v1(29.355,32.342) Q6.1 ; Q6.3 v1(30.326,34.564) ; v1@30.385,22.439 v1(30.385,22.58) ; Q4.1 v1(30.385,29.167) ; P5.6 v1(67.286,26.65)
  Top Layer w1: SW1.2@49.407,28.028 SW1.2@49.407,35.978 ; SW2.2@57.953,28.028 SW2.2@57.953,35.978
  Bottom Layer w0.5: P6.6 67.274,26.638 v1(67.286,26.65)
  other v1: 45.114,16.686
IORET: P1.7
M\_\C\H\R\G\: P4.8 R10.2 R11.2 U1.3 | length 65.2
  Top Layer w0.3: v1(17.716,42.333) 17.716,44.702 18.185,45.171 R11.2 20.646,45.171 21.218,44.599 21.218,41.715 21.881,41.052 U1.3 ; v1(30.694,43.054) 30.946,43.306 R10.2
  Mid-Layer2 w0.3: v1(17.716,42.333) 29.973,42.333 v1(30.694,43.054) ; v1(20.806,39.243) 21.733,38.316 31.93,38.316 44.554,50.94 P4.8
  Bottom Layer w0.3: v1(17.716,42.333) 17.716,40.685 19.158,39.243 v1(20.806,39.243)
MISO: P5.1 P6.1 | length 6
  Top Layer w0.5: v1(59.872,30.62) P5.1
  Bottom Layer w0.203: v1@59.843,30.591 v1(59.872,30.62)
  Bottom Layer w0.5: v1(59.872,30.62) P6.1
MOIS: P5.4 P6.4 | length 2.6
  Top Layer w0.5: P5.4 v1(67.286,29.367)
  Bottom Layer w0.5: P6.4 v1@67.274,29.355
MOTOR-: D4.1 J5.1 Q8.3 | length 15.2
  Top Layer w0.5: v1(53.148,20.085) v1@53.188,20.045 ; D4.1 D4.1@54.279,19.926
  Top Layer w1: v1@53.188,20.045 D4.1 ; Q8.3 D4.1@54.279,19.926
  Bottom Layer w1: v1(53.148,20.085) 56.753,20.085 59.736,17.102 J5.1
MOTOREN: P2.5 R36.2 | length 12.1
  Top Layer w0.3: P2.5 53.512,5.816 52.633,6.695 52.633,11.948 53.481,12.796 R36.2
NetC1_1: C1.1 U1.4 | length 3
  Top Layer w0.3: C1.1 24.644,40.552 U1.4
NetC3_1: C3.1 D1.2 R1.1 U1.8 | length 12.1
  Top Layer w0.3: U1.8 29.194,41.052 28.325,41.921 28.325,43.26 29.103,44.038 29.103,46.201 29.355,46.453 32.285,46.453 R1.1
NetD3_2: D3.2 P1.4 | length 10.8
  Top Layer w0.5: P1.4 38.312,4.734 41.618,8.04 D3.2
  Bottom Layer w0.5: P1.4 P1.4@38.419,2.787
NetLED1_2: LED1.2 R14.1 | length 2.9
  Top Layer w0.3: R14.1 37.946,29.809 38.189,30.052 LED1.2@39.406,30.052
NetLED1_3: LED1.3 R13.1 | length 5.3
  Top Layer w0.3: R13.1 40.347,31.309 40.906,30.75 LED1.3
NetLED1_4: LED1.4 R12.1 | length 6.6
  Top Layer w0.3: R12.1 36.575,27.8 37.08,27.295 40.479,27.295 40.906,27.722 LED1.4
NetLED2_2: LED2.2 R18.1 | length 2.9
  Top Layer w0.3: R18.1 38.008,24.309 38.145,24.446 LED2.2
NetLED2_3: LED2.3 R17.1 | length 5.3
  Top Layer w0.3: R17.1 40.317,25.809 40.906,25.22 LED2.3
NetLED2_4: LED2.4 R16.1 | length 7
  Top Layer w0.3: R16.1 36.575,21.991 37.039,21.527 40.479,21.527 40.906,21.954 LED2.4
NetLED3_2: LED3.2 R21.1 | length 3.1
  Top Layer w0.3: LED3.2 21.338,18.66 21.993,19.315 R21.1
NetLED3_3: LED3.3 R20.1 | length 5
  Top Layer w0.3: LED3.3 18.282,18.077 18.544,17.815 R20.1
NetLED3_4: LED3.4 R19.1 | length 5.3
  Top Layer w0.3: LED3.4 18.282,20.445 18.652,20.815 R19.1
NetLED4_2: LED4.2 R24.1 | length 3.1
  Top Layer w0.3: LED4.2 21.276,24.057 21.934,24.715 R24.1
NetLED4_3: LED4.3 R23.1 | length 5
  Top Layer w0.3: LED4.3 18.282,23.536 18.603,23.215 R23.1
NetLED4_4: LED4.4 R22.1 | length 5.3
  Top Layer w0.3: LED4.4 18.282,25.904 18.593,26.215 R22.1
NetLED5_2: LED5.2 R27.1 | length 3
  Top Layer w0.3: LED5.2 21.435,29.469 21.881,29.915 R27.1
NetLED5_3: LED5.3 R26.1 | length 5.2
  Top Layer w0.3: LED5.3 18.282,28.789 18.656,28.415 R26.1
NetLED5_4: LED5.4 R25.1 | length 5.1
  Top Layer w0.3: LED5.4 18.282,31.054 18.643,31.415 R25.1
NetLED6_2: LED6.2 R30.1 | length 3
  Top Layer w0.3: LED6.2 21.376,34.869 21.822,35.315 R30.1
NetLED6_3: LED6.3 R29.1 | length 5.1
  Top Layer w0.3: LED6.3 18.282,34.248 18.715,33.815 R29.1
NetLED6_4: LED6.4 R28.1 | length 5.1
  Top Layer w0.3: LED6.4 18.282,36.513 18.584,36.815 R28.1
NetQ1_1: Q1.1 R1.2 U1.9 | length 6.9
  Top Layer w0.3: U1.9 31.664,41.552 31.93,41.818 Q1.1 33.185,42.352 34.768,43.935 R1.2
NetQ1_2: Q1.2 U1.7 | length 2.9
  Top Layer w0.3: U1.7 31.591,40.552 32.209,41.17 Q1.2
NetQ1_4: Q1.4 Q7.3 R7.2 TP6.1 | length 64.9
  Top Layer w0.2: v1(32.342,36.771) 32.342,39.655 32.56,39.873 Q1.4 ; TP6.1@33.476,6.592 TP6.1 ; Q7.3 46.962,17.813 v1(46.968,17.819)
  Top Layer w0.3: v1(29.87,11.845) 29.87,12.36 30.133,12.623 R7.2 ; v2(32.651,6.592) TP6.1@33.476,6.592
  Mid-Layer2 w0.3: v1(32.342,36.771) 31.209,36.771 27.707,33.269 27.707,25.235 28.928,24.014 28.928,12.787 v1(29.87,11.845) ; v2(32.651,6.592) 32.651,11.021 31.827,11.845 v1(29.87,11.845) ; v1(46.968,17.819) 43.672,17.819 42.642,16.789 42.642,14.317 41.818,13.493 31.518,13.493 v1(29.87,11.845)
NetQ1_5: Q1.5 R8.1 TP7.1 | length 49.7
  Top Layer w0.5: v1(31.724,16.274) 30.385,16.274 30.019,15.908 R8.1 30.019,14.168 30.282,13.905 32.785,13.905 TP7.1 ; v1(34.093,39.037) 34.481,39.425 Q1.5@34.481,40.199
  Mid-Layer2 w1: v1(31.724,16.274) 37.904,22.454 37.904,31.93 43.569,37.595 v1(43.569,39.655)
  Bottom Layer w1: v1(34.093,39.037) 36.05,37.08 42.745,37.08 43.569,37.904 v1(43.569,39.655)
NetQ2_2: Q2.2 R4.2 | length 1.9
  Top Layer w0.2: R4.2 22.631,7.427 Q2.2
NetQ2_3: Q2.3 Q3.2 R5.2 | length 5
  Top Layer w0.3: Q3.2 24.029,11.3 24.983,10.346 R5.2 24.983,9.213 25.227,8.969 Q2.3
NetQ2_5: Q2.5 R37.2 | length 2.7
  Top Layer w0.2: Q2.5 26.139,7.027 26.734,6.432 R37.2
NetQ2_6: Q2.6 Q3.4 R38.2 | length 11.5
  Top Layer w0.3: Q2.6 24.811,6.089 v1(24.823,6.077) ; Q3.4 26.265,12.154 v1(26.368,12.051) 26.368,11.33 26.929,10.769 R38.2
  Bottom Layer w0.3: v1(24.823,6.077) 24.823,11.33 25.544,12.051 v1(26.368,12.051)
NetQ4_5: Q4.5 R13.2 R17.2 | length 11.6
  Top Layer w0.3: Q4.5@31.681,27.015 32.007,26.689 32.226,26.689 33.257,26.689 33.578,26.368 v1(33.784,25.853) 33.622,25.809 R17.2 ; v1@33.581,31.309 R13.2
  Bottom Layer w0.3: v1(33.784,25.853) v1(33.784,31.312)
NetQ4_7: Q4.7 R12.2 R16.2 | length 11
  Top Layer w0.3: Q4.7@31.681,28.311 31.683,28.309 v1(33.063,28.309) R12.2 ; v1(32.96,25.132) 32.96,23.484 33.635,22.809 R16.2
  Bottom Layer w0.3: v1(32.96,25.132) 32.96,28.206 v1(33.063,28.309)
NetQ5_5: Q5.5 R20.2 R23.2 R26.2 R29.2 | length 33.4
  Top Layer w0.3: R20.2 25.231,17.815 25.956,18.54 v1(25.956,19.982) 25.956,22.557 25.298,23.215 R23.2 ; R26.2 v1(24.764,28.415) ; R29.2 v1(24.764,33.815) ; 25.956,22.454 27.502,22.454 27.513,22.442 Q5.5@27.84,22.116 ; Q5.5@27.837,22.116 Q5.5@27.84,22.116 ; Q5.5@28.059,22.116 Q5.5@27.84,22.116
  Bottom Layer w0.3: v1(24.764,28.415) 23.806,28.415 23.793,28.428 ; v1(24.764,33.815) 23.793,32.844 23.793,28.428 ; v1(25.956,19.982) 25.956,18.334 25.544,17.922 24.308,17.922 23.793,18.437 23.793,28.428
NetQ5_7: Q5.7 R19.2 R22.2 R25.2 R28.2 | length 29.6
  Top Layer w0.3: R19.2 v1(24.764,20.815) ; R22.2 v1(24.764,26.215) ; R25.2 v1(24.764,31.415) ; R28.2 v1(24.764,36.815) ; v1(26.677,21.218) 27.764,21.218 Q5.7@28.059,20.923 ; Q5.7@28.059,20.82 Q5.7@28.059,20.923 ; Q5.7@28.059,20.971 Q5.7@28.059,20.923
  Bottom Layer w0.3: v1(24.764,20.815) 26.274,20.815 v1(26.677,21.218) 26.677,23.318 27.088,23.729 27.088,25.648 ; v1(24.764,26.215) 26.521,26.215 27.088,25.648 ; v1(24.764,31.415) 26.367,31.415 27.088,30.694 ; v1(24.764,36.815) 26.015,36.815 27.088,35.742 27.088,30.694 ; 27.088,25.648 27.088,30.694
NetQ6_5: Q6.5 R21.2 R24.2 R27.2 R30.2 | length 40.6
  Top Layer w0.3: v1(17.922,21.321) 17.201,22.042 17.201,26.265 18.231,27.295 25.647,27.295 ; R21.2 v1(24.764,19.315) ; R24.2 25.062,24.715 25.647,25.3 25.647,27.295 ; R27.2 25.087,29.915 25.647,29.355 ; R30.2 24.058,35.214 27.733,35.214 Q6.5@28.059,34.888 ; 25.647,35.214 25.647,29.355 ; 25.647,27.295 25.647,29.355
  Mid-Layer2 w0.3: v1(17.922,21.321) 20.909,21.321 22.915,19.315 v1(24.764,19.315)
NetQ6_7: Q6.7 R14.2 R18.2 | length 24.7
  Top Layer w0.3: Q6.7@27.513,33.269 26.78,33.269 26.368,32.857 26.368,29.458 26.368,28.84 31.003,24.205 v1(32.136,24.205) ; 27.655,27.553 29.97,29.867 35.167,29.867 R14.2 ; v1(33.887,24.205) 33.991,24.309 R18.2
  Bottom Layer w0.3: v1(32.136,24.205) v1(33.887,24.205)
NetQ7_2: Q7.2 R6.2 | length 27.2
  Top Layer w0.2: Q7.2 v1@45.93,19.562
  Top Layer w0.3: R6.2 31.518,5.768 32.136,5.15 34.505,5.15 40.994,11.639 v1(40.994,15.244) ; v1@45.93,19.562 v1(45.938,19.57)
  Mid-Layer2 w0.3: v1(40.994,15.244) 40.994,17.922 42.642,19.57 v1(45.938,19.57)
NetQ7_5: Q7.5 R34.1 | length 5.7
  Top Layer w0.2: Q7.5 45.53,17.189 45.827,16.892 48.616,16.892 48.862,17.138 R34.1
NetQ8_1: Q8.1 R36.1 | length 3.3
  Top Layer w0.5: R36.1 56.079,14.158 56.379,14.458 Q8.1
NetR2_1: R2.1 U1.6 | length 14.3
  Top Layer w0.3: R2.1 19.463,38.835 20.6,37.698 29.767,37.698 30.57,38.501 U1.6@30.57,39.984
NetR3_1: R3.1 U1.2 | length 2.8
  Top Layer w0.3: R3.1 24.823,42.024 25.295,41.552 U1.2
P1_5: P2.3 R10.1 | length 74.2
  Top Layer w0.3: R10.1 32.388,44.656 32.754,44.29 v1(32.754,43.363)
  Mid-Layer2 w0.3: P2.3 58.592,5.444 61.182,8.034 61.182,36.256 v1(62.109,37.183)
  Bottom Layer w0.3: v1(32.754,43.363) 32.754,37.904 34.711,35.947 60.873,35.947 v1(62.109,37.183)
R_CH1: P4.4 Q6.2 | length 57.6
  Top Layer w0.3: Q6.2 29.943,33.917 30.282,33.578 v1(30.591,33.578)
  Mid-Layer2 w0.3: v1(30.591,33.578) 30.591,32.239 28.891,30.539 28.758,30.406 28.758,25.729 31.003,23.484 34.917,23.484 35.947,24.514 35.947,35.329 47.483,46.865 54.899,46.865 56.092,48.058 P4.4
R_CH2/C: P3.2 Q6.4 TP10.1 | length 28.8
  Top Layer w0.3: TP10.1 28.755,29.888 31.312,32.445 31.312,34.608 31.918,35.214 ; Q6.4 29.405,35.264 31.868,35.264 31.918,35.214 ; P3.2 39.208,42.504 31.918,35.214
RESET_N: P1.6 P5.5 P6.5 | length 58.9
  Top Layer w0.3: P5.5@62.837,25.544 P5.5
  Top Layer w0.5: v1(54.487,25.544) v1(59.843,25.544) P5.5@62.837,25.544
  Mid-Layer2 w0.3: P1.6 33.192,2.91 35.638,5.356 55.517,5.356 58.195,8.034 58.195,23.793 56.444,25.544 v1(54.487,25.544)
  Bottom Layer w0.3: P6.5@62.825,25.544 P6.5
  Bottom Layer w0.5: v1(59.843,25.544) P6.5@62.825,25.544
SCK: P5.3 P6.3 | length 5.9
  Top Layer w0.5: v1(59.86,28.08) P5.3
  Bottom Layer w0.5: v1(59.86,28.08) P6.3@62.817,28.08
SCL: J1.4 P3.10 | length 20.2
  Bottom Layer w0.5: J1.4 7.031,46.731 11.24,50.94 P3.10
SDA: J1.3 P3.9 R31.2 | length 124.9
  Top Layer w0.5: v1(54.075,7.313) R31.2
  Mid-Layer2 w0.3: P3.9 21.508,48.803 20.806,48.101 14.626,48.101 8.652,42.127 8.652,5.562 9.373,4.841 34.196,4.841 35.329,5.974 52.736,5.974 v1(54.075,7.313)
  Bottom Layer w0.5: J1.3 9.167,40.346 9.167,45.732 11.948,48.513 19.081,48.513 P3.9
VDD_BT_CHG: D1.1 J4.1 | length 55.4
  Top Layer w1: D1.1 v1(27.249,47.49)
  Mid-Layer2 w1.5: J4.1 10.717,40.999 15.862,46.144 22.454,46.144 23.484,47.174 v1(23.484,48.41)
  Bottom Layer w1: v1(23.484,48.41) 26.329,48.41 v1(27.249,47.49)
VIN: P1.1
pads on no net: P1.8 P2.1 P2.2 U1.10

## Polygon pours and split planes (outlines as drawn)
GND on Top Layer "Top Layer-No Net" (solid, remove dead copper, pour order 0): -0.927,54.796 -0.824,54.693 71.276,54.693 71.276,-1.442 71.379,-1.545 -0.515,-1.545 -0.515,54.487 -0.927,54.899
GND on Bottom Layer "Bottom Layer-No Net" (solid, remove dead copper, pour order 2): -0.927,54.59 71.379,54.59 71.379,-1.133 71.173,-1.339 -0.824,-1.339 -0.824,54.384 -1.03,54.59
GND on Mid-layer1 (split plane): 0.957,0.514 0.959,0.513 0.955,0.514 0.953,0.515
GND on Mid-layer1 (split plane): 1.067,53.128 1.067,53.129 1.092,53.127 65.204,53.127 66.673,51.657 66.673,39.677 66.683,39.577 66.712,39.481 66.759,39.393 66.822,39.316 67.319,38.82 69.594,36.503 69.594,6.663 66.82,3.889 66.757,3.812 66.709,3.723 66.68,3.628 66.671,3.528 66.671,1.087 66.639,1.011 66.582,0.907 66.504,0.797 66.415,0.697 66.315,0.608 66.205,0.53 66.109,0.477 1.371,0.477 1.32,0.472 1.32,0.474 1.318,0.495 1.27,0.474 1.271,0.47 1.167,0.478 1.163,0.479 1.15,0.483 1.146,0.484 1.067,0.491 1.067,0.492 1.01,0.498 0.961,0.512 0.95,0.517 0.953,0.515 0.95,0.517 0.943,0.521 0.886,0.538 0.887,0.54 0.866,0.545 0.782,0.58 0.704,0.627 0.635,0.686 0.576,0.755 0.575,0.756 0.569,0.768 0.566,0.771 0.566,0.772 0.528,0.833 0.493,0.917 0.472,1.006 0.466,1.078 0.467,1.082 0.464,1.108 0.496,1.108 0.477,1.154 0.464,1.184 0.464,52.596 0.483,52.594 0.496,52.626 0.465,52.626 0.467,52.641 0.488,52.729 0.523,52.813 0.57,52.891 0.629,52.96 0.698,53.019 0.776,53.067 0.86,53.101 0.948,53.123 1.039,53.13

## Keep-outs
Keep-Out Layer:
  lines w0.254: 0.081,1.108 0.081,52.626 cw(c1.039,52.55) 1.089,53.51 65.362,53.51 ; 0.083,1.149 ccw(c1.043,1.099) 0.805,0.167 ; 0.807,0.163 ccw(c1.077,0.845) 1.062,0.112 ccw(c1.271,1.147) 1.345,0.094 66.192,0.094 ccw(c65.569,1.543) 67.054,1.011 67.054,3.581 69.977,6.504 69.977,36.712 67.056,39.633 67.056,51.816 65.364,53.508

## Other copper
Bottom Layer:
  rectangle net GND: 39.552,1.339 44.393,3.914

## Silkscreen, mask and mechanical layers (free items; w line width, h text height)
Top Overlay:
  drawing of 2344 lines, arcs and shapes, not listed
  text "BAT CHRG" at 38.625,38.419 h2.2 r90
  text "BLE_SW" at 52.391,37.465 h2.29
  text "ATOM_PW" at 43.175,37.442 h2.29
  text "ATOM2 PW & /  GPIO (J1)" at 12.154,29.87 h2.29 r90
  text "LED2" at 14.626,25.544 h2.29 r90
  text "P.B DRV" at 43.899,23.306 h2.29
  text "M. DRV" at 51.716,22.45 h2.29
  text "ICSP" at 63.274,22.271 h2.29
  text "ATOM1 PW / (J2)" at 12.1,22.012 h2.29 r90
  text "PWM" at 33.681,17.922 h2.29 r90
  text "LED1" at 41.097,16.171 h2.29 r90
  text "BAT PW / (J3)" at 12.154,14.626 h2.29 r90
  text "ATOM1,2 DRV" at 17.716,7.416 h1.4 r90
  text "BAT CHRG /  LEVEL" at 39.681,6.485 h1.25 r90
  text "Bz.M (J5)" at 62.212,5.459 h2
  text "EXT PW (J4)" at 14.197,2.7 h2.29 r90
Bottom Overlay:
  drawing of 2266 lines, arcs and shapes, not listed
  text "ICSP" at 66.95,32.239 h2.29